# Altium PCB ARDUINO_DUE_2021-11-28.pcbdoc
Units mm, origin at the board's own origin, x right, y up, seen from the top; angles counter-clockwise.
Board outline 118.54 x 77.67 mm, 2 copper layers (Top Layer, Bottom Layer); 1 components, 0 nets, 100 pads, 0 vias.
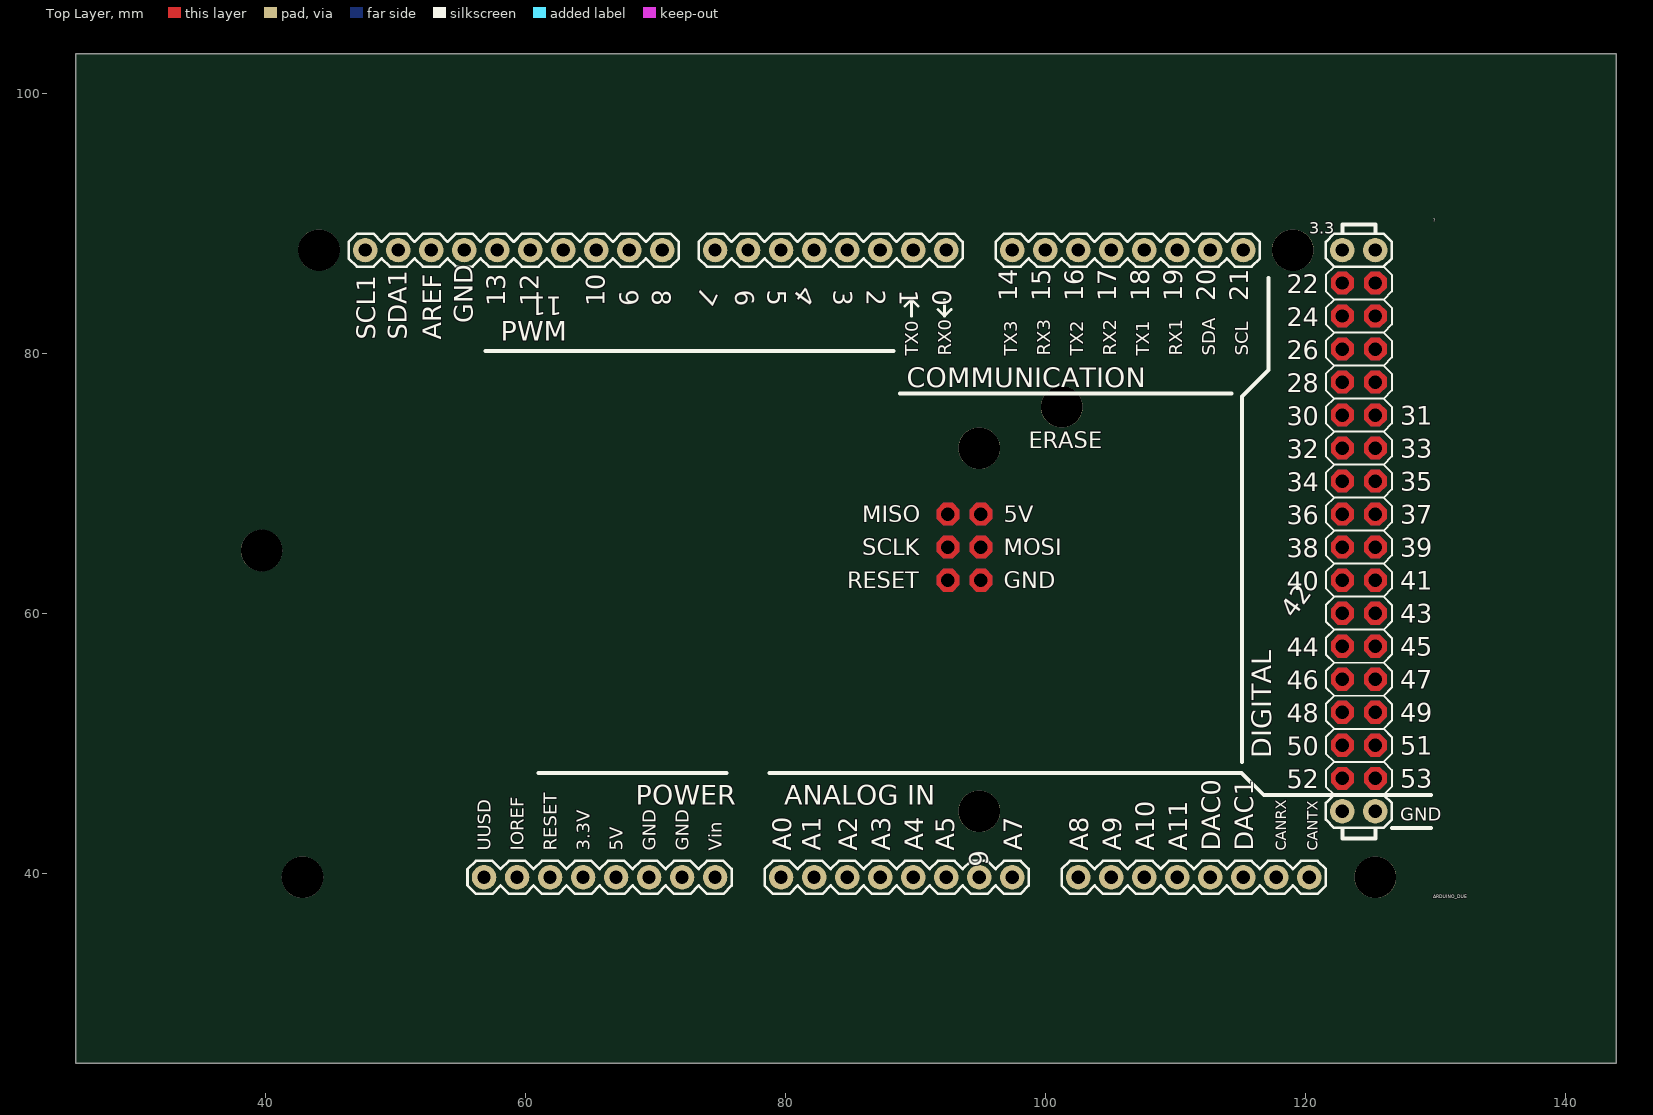
[diagram p0: Top Layer view]
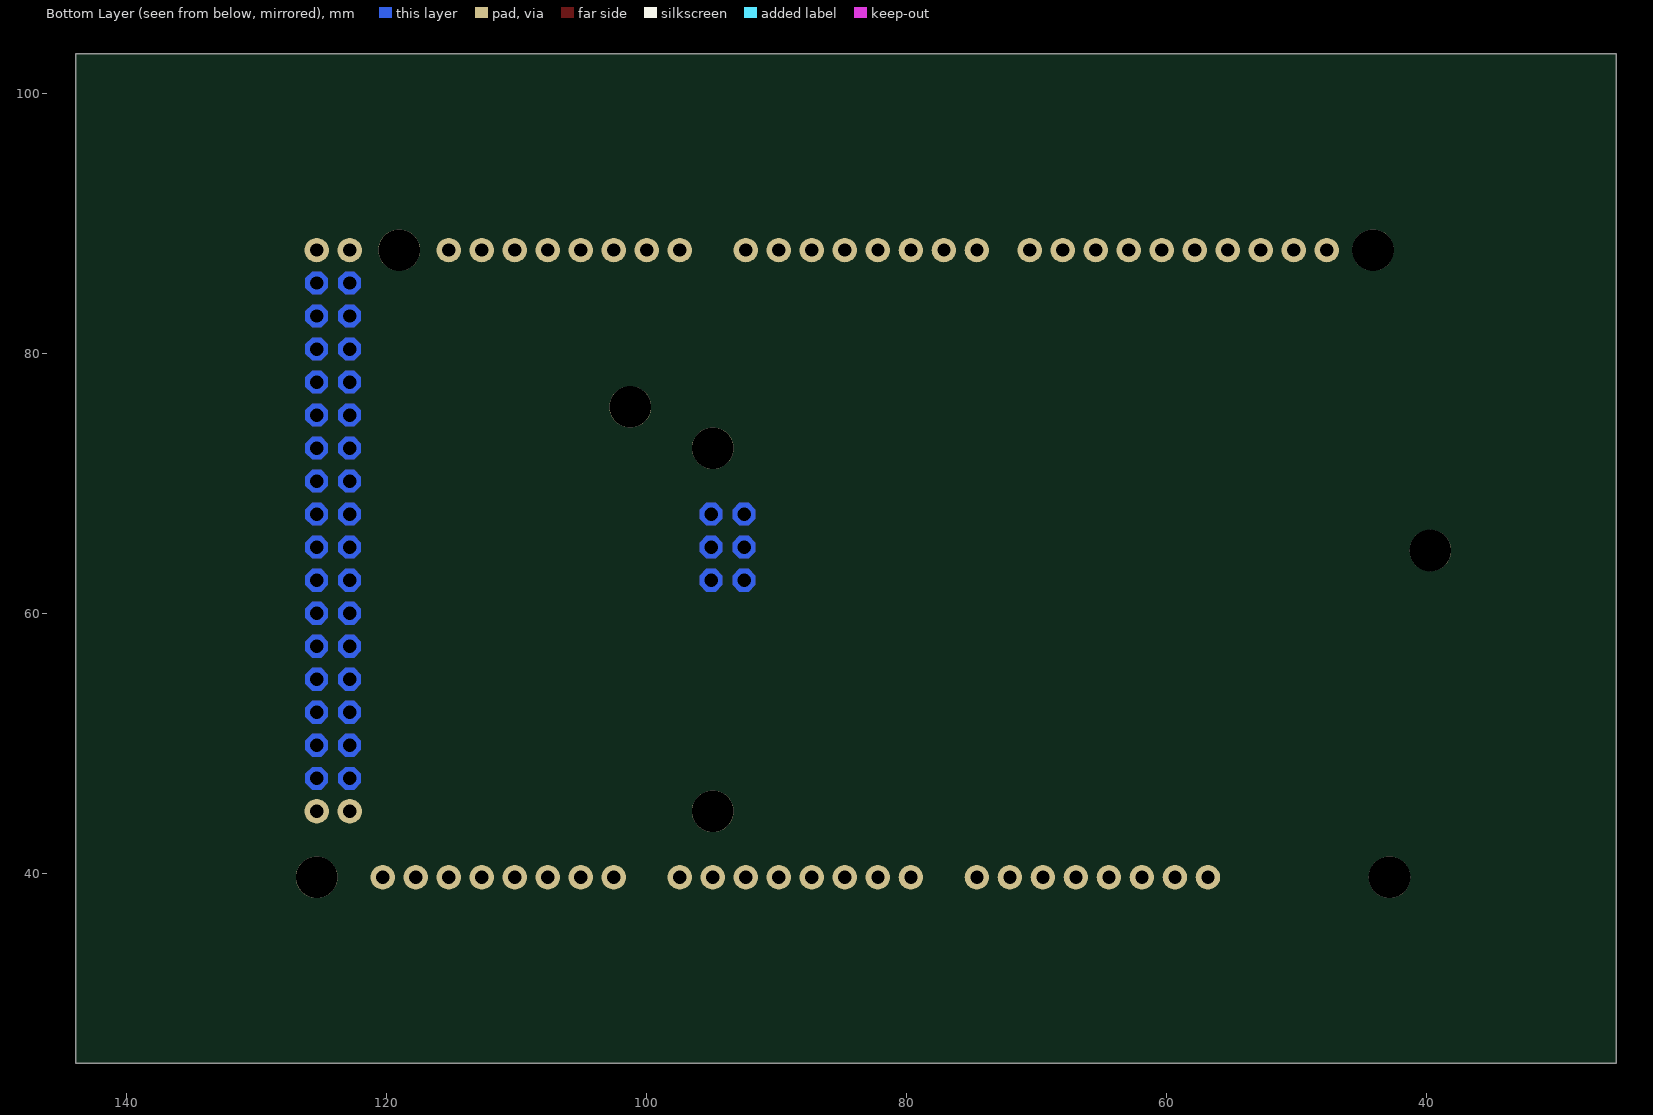
[diagram p1: Bottom Layer view, seen from below]

## Layer stack, top to bottom
Top Layer: signal copper (thickness not stored)
Dielectric: dielectric 0.32, FR-4, Dk 4.8
Bottom Layer: signal copper (thickness not stored)

## Board outline
143.941,25.4 25.4,25.4 25.4,103.073 143.941,103.073

## Components (designator, comment, footprint, x,y, rotation, side; value= is the part's Value field where it differs from the comment)
? "ARDUINO_DUE" ARDUINO_DUE 83.972,64.109 r0 top

## Footprints (in the part's own frame and the unit in brackets; to place one, negate y for a bottom-side part, rotate by r counter-clockwise, add the part's x,y. Pads: shape width x height; smd on the part's side, far side on the other; paste and mask are expansions set on the pad)
ARDUINO_DUE [mil]
  round 74 hole 40: 0(331,938.99) 1(231,938.99) 2(131,938.99) 3(31,938.99) 3.3V(-769,-961) 4(-69,938.99) 5(-169,938.99) 5V@0(-669,-961) 5V@1(1531,938.99) 5V@2(1631,938.99) 6(-269,938.99) 7(-369,938.99) 8(-529,938.99) 9(-629,938.99) 10(-729,938.99) 11(-829,938.99) 12(-929,938.99) 13(-1029,938.99) 14(531,938.99) 15(631,938.99) 16(731,938.99) 17(831,938.99) 18(931,938.99) 19(1031,938.99) 20(1131,938.99) 21(1231,938.99) A0(-169,-961) A1(-69,-961) A2(31,-961) A3(131,-961) A4(231,-961) A5(331,-961) A6(431,-961) A7(531,-961) A8(731,-961) A9(831,-961) A10(931,-961) A11(1031,-961) AREF(-1229,938.99) CANRX(1331,-961) CANTX(1431,-961) DAC0(1131,-961) DAC1(1231,-961) GND@0(-569,-961) GND@1(-469,-961) GND@2(1531,-761) GND@3(1631,-761) GND@4(-1129,938.99) IOREF(-969,-961) RESET(-869,-961) SCL1(-1429,938.99) SDA1(-1329,938.99) UUSD(-1069,-961) VIN(-369,-961)
  round 0 hole 40: 5V@ICSP(436,138.99) 22(1531,838.99) 23(1631,838.99) 24(1531,738.99) 25(1631,738.99) 26(1531,638.99) 27(1631,638.99) 28(1531,538.99) 29(1631,538.99) 30(1531,438.99) 31(1631,438.99) 32(1531,338.99) 33(1631,338.99) 34(1531,238.99) 35(1631,238.99) 36(1531,138.99) 37(1631,138.99) 38(1531,38.99) 39(1631,38.99) 40(1531,-61.01) 41(1631,-61.01) 42(1531,-161.01) 43(1631,-161.01) 44(1531,-261.01) 45(1631,-261.01) 46(1531,-361.01) 47(1631,-361.01) 48(1531,-461.01) 49(1631,-461.01) 50(1531,-561) 51(1631,-561) 52(1531,-661) 53(1631,-661) GND@ICSP(436,-61.01) MISO(336,138.99) MOSI(436,38.99) RESET@ICSP(336,-61.01) SCLK(336,38.99)
  round 125.98 hole 125.98 unplated: ""(-1743,28.99) ""(-1619,-961) ""(-1569,938.99) ""(431,-761) ""(431,338.99) ""(681,463.99) ""(1381,938.99) ""(1631,-961)
  Top Layer region: 1616.84,173.18 1596.81,153.16 1596.81,124.84 1616.84,104.81 1645.15,104.81 1665.18,124.84 1665.18,153.16 1645.15,173.18
  Top Layer region: 1516.84,173.18 1496.81,153.16 1496.81,124.84 1516.84,104.81 1545.15,104.81 1565.18,124.84 1565.18,153.16 1545.15,173.18
  Top Layer region: 1616.84,273.18 1596.81,253.16 1596.81,224.84 1616.84,204.81 1645.15,204.81 1665.18,224.84 1665.18,253.16 1645.15,273.18
  Top Layer region: 1516.84,273.18 1496.81,253.16 1496.81,224.84 1516.84,204.81 1545.15,204.81 1565.18,224.84 1565.18,253.16 1545.15,273.18
  Top Layer region: 1616.84,373.18 1596.81,353.16 1596.81,324.84 1616.84,304.81 1645.15,304.81 1665.18,324.84 1665.18,353.16 1645.15,373.18
  Top Layer region: 1516.84,373.18 1496.81,353.16 1496.81,324.84 1516.84,304.81 1545.15,304.81 1565.18,324.84 1565.18,353.16 1545.15,373.18
  Top Layer region: 1616.84,473.18 1596.81,453.16 1596.81,424.84 1616.84,404.81 1645.15,404.81 1665.18,424.84 1665.18,453.16 1645.15,473.18
  Top Layer region: 1516.84,473.18 1496.81,453.16 1496.81,424.84 1516.84,404.81 1545.15,404.81 1565.18,424.84 1565.18,453.16 1545.15,473.18
  Top Layer region: 1616.84,573.18 1596.81,553.16 1596.81,524.84 1616.84,504.81 1645.15,504.81 1665.18,524.84 1665.18,553.16 1645.15,573.18
  Top Layer region: 1516.84,573.18 1496.81,553.16 1496.81,524.84 1516.84,504.81 1545.15,504.81 1565.18,524.84 1565.18,553.16 1545.15,573.18
  Top Layer region: 1616.84,673.18 1596.81,653.16 1596.81,624.84 1616.84,604.81 1645.15,604.81 1665.18,624.84 1665.18,653.16 1645.15,673.18
  Top Layer region: 1516.84,673.18 1496.81,653.16 1496.81,624.84 1516.84,604.81 1545.15,604.81 1565.18,624.84 1565.18,653.16 1545.15,673.18
  Top Layer region: 1616.84,773.18 1596.81,753.16 1596.81,724.84 1616.84,704.81 1645.15,704.81 1665.18,724.84 1665.18,753.16 1645.15,773.18
  Top Layer region: 1516.84,773.18 1496.81,753.16 1496.81,724.84 1516.84,704.81 1545.15,704.81 1565.18,724.84 1565.18,753.16 1545.15,773.18
  Top Layer region: 1616.84,873.18 1596.81,853.16 1596.81,824.84 1616.84,804.81 1645.15,804.81 1665.18,824.84 1665.18,853.16 1645.15,873.18
  Top Layer region: 1516.84,873.18 1496.81,853.16 1496.81,824.84 1516.84,804.81 1545.15,804.81 1565.18,824.84 1565.18,853.16 1545.15,873.18
  Top Layer region: 1616.84,-626.82 1596.81,-646.84 1596.81,-675.16 1616.84,-695.18 1645.15,-695.18 1665.18,-675.16 1665.18,-646.84 1645.15,-626.82
  Top Layer region: 1516.84,-626.82 1496.81,-646.84 1496.81,-675.16 1516.84,-695.18 1545.15,-695.18 1565.18,-675.16 1565.18,-646.84 1545.15,-626.82
  Top Layer region: 1616.84,-526.82 1596.81,-546.84 1596.81,-575.16 1616.84,-595.18 1645.15,-595.18 1665.18,-575.16 1665.18,-546.84 1645.15,-526.82
  Top Layer region: 1516.84,-526.82 1496.81,-546.84 1496.81,-575.16 1516.84,-595.18 1545.15,-595.18 1565.18,-575.16 1565.18,-546.84 1545.15,-526.82
  Top Layer region: 1616.84,-426.82 1596.81,-446.84 1596.81,-475.16 1616.84,-495.18 1645.15,-495.18 1665.18,-475.16 1665.18,-446.84 1645.15,-426.82
  Top Layer region: 1516.84,-426.82 1496.81,-446.84 1496.81,-475.16 1516.84,-495.18 1545.15,-495.18 1565.18,-475.16 1565.18,-446.84 1545.15,-426.82
  Top Layer region: 1616.84,-326.82 1596.81,-346.84 1596.81,-375.16 1616.84,-395.18 1645.15,-395.18 1665.18,-375.16 1665.18,-346.84 1645.15,-326.82
  Top Layer region: 1516.84,-326.82 1496.81,-346.84 1496.81,-375.16 1516.84,-395.18 1545.15,-395.18 1565.18,-375.16 1565.18,-346.84 1545.15,-326.82
  Top Layer region: 1616.84,-226.82 1596.81,-246.84 1596.81,-275.16 1616.84,-295.18 1645.15,-295.18 1665.18,-275.16 1665.18,-246.84 1645.15,-226.82
  Top Layer region: 1516.84,-226.82 1496.81,-246.84 1496.81,-275.16 1516.84,-295.18 1545.15,-295.18 1565.18,-275.16 1565.18,-246.84 1545.15,-226.82
  Top Layer region: 1616.84,-126.82 1596.81,-146.84 1596.81,-175.16 1616.84,-195.19 1645.15,-195.19 1665.18,-175.16 1665.18,-146.84 1645.15,-126.82
  Top Layer region: 1516.84,-126.82 1496.81,-146.84 1496.81,-175.16 1516.84,-195.19 1545.15,-195.19 1565.18,-175.16 1565.18,-146.84 1545.15,-126.82
  Top Layer region: 1616.84,-26.82 1596.81,-46.84 1596.81,-75.16 1616.84,-95.19 1645.15,-95.19 1665.18,-75.16 1665.18,-46.84 1645.15,-26.82
  Top Layer region: 1516.84,-26.82 1496.81,-46.84 1496.81,-75.16 1516.84,-95.19 1545.15,-95.19 1565.18,-75.16 1565.18,-46.84 1545.15,-26.82
  Top Layer region: 1616.84,73.18 1596.81,53.16 1596.81,24.84 1616.84,4.81 1645.15,4.81 1665.18,24.84 1665.18,53.16 1645.15,73.18
  Top Layer region: 1516.84,73.18 1496.81,53.16 1496.81,24.84 1516.84,4.81 1545.15,4.81 1565.18,24.84 1565.18,53.16 1545.15,73.18
  Top Layer region: 321.84,173.18 301.81,153.16 301.81,124.84 321.84,104.81 350.16,104.81 370.18,124.84 370.18,153.16 350.16,173.18
  Top Layer region: 421.84,173.18 401.81,153.16 401.81,124.84 421.84,104.81 450.16,104.81 470.18,124.84 470.18,153.16 450.16,173.18
  Top Layer region: 321.84,73.18 301.81,53.16 301.81,24.84 321.84,4.81 350.16,4.81 370.18,24.84 370.18,53.16 350.16,73.18
  Top Layer region: 421.84,73.18 401.81,53.16 401.81,24.84 421.84,4.81 450.16,4.81 470.18,24.84 470.18,53.16 450.16,73.18
  Top Layer region: 421.84,-26.82 401.81,-46.84 401.81,-75.16 421.84,-95.19 450.16,-95.19 470.18,-75.16 470.18,-46.84 450.16,-26.82
  Top Layer region: 321.84,-26.82 301.81,-46.84 301.81,-75.16 321.84,-95.19 350.16,-95.19 370.18,-75.16 370.18,-46.84 350.16,-26.82
  Bottom Layer region: 1616.84,173.18 1596.81,153.16 1596.81,124.84 1616.84,104.81 1645.15,104.81 1665.18,124.84 1665.18,153.16 1645.15,173.18
  Bottom Layer region: 1516.84,173.18 1496.81,153.16 1496.81,124.84 1516.84,104.81 1545.15,104.81 1565.18,124.84 1565.18,153.16 1545.15,173.18
  Bottom Layer region: 1616.84,273.18 1596.81,253.16 1596.81,224.84 1616.84,204.81 1645.15,204.81 1665.18,224.84 1665.18,253.16 1645.15,273.18
  Bottom Layer region: 1516.84,273.18 1496.81,253.16 1496.81,224.84 1516.84,204.81 1545.15,204.81 1565.18,224.84 1565.18,253.16 1545.15,273.18
  Bottom Layer region: 1616.84,373.18 1596.81,353.16 1596.81,324.84 1616.84,304.81 1645.15,304.81 1665.18,324.84 1665.18,353.16 1645.15,373.18
  Bottom Layer region: 1516.84,373.18 1496.81,353.16 1496.81,324.84 1516.84,304.81 1545.15,304.81 1565.18,324.84 1565.18,353.16 1545.15,373.18
  Bottom Layer region: 1616.84,473.18 1596.81,453.16 1596.81,424.84 1616.84,404.81 1645.15,404.81 1665.18,424.84 1665.18,453.16 1645.15,473.18
  Bottom Layer region: 1516.84,473.18 1496.81,453.16 1496.81,424.84 1516.84,404.81 1545.15,404.81 1565.18,424.84 1565.18,453.16 1545.15,473.18
  Bottom Layer region: 1616.84,573.18 1596.81,553.16 1596.81,524.84 1616.84,504.81 1645.15,504.81 1665.18,524.84 1665.18,553.16 1645.15,573.18
  Bottom Layer region: 1516.84,573.18 1496.81,553.16 1496.81,524.84 1516.84,504.81 1545.15,504.81 1565.18,524.84 1565.18,553.16 1545.15,573.18
  Bottom Layer region: 1616.84,673.18 1596.81,653.16 1596.81,624.84 1616.84,604.81 1645.15,604.81 1665.18,624.84 1665.18,653.16 1645.15,673.18
  Bottom Layer region: 1516.84,673.18 1496.81,653.16 1496.81,624.84 1516.84,604.81 1545.15,604.81 1565.18,624.84 1565.18,653.16 1545.15,673.18
  Bottom Layer region: 1616.84,773.18 1596.81,753.16 1596.81,724.84 1616.84,704.81 1645.15,704.81 1665.18,724.84 1665.18,753.16 1645.15,773.18
  Bottom Layer region: 1516.84,773.18 1496.81,753.16 1496.81,724.84 1516.84,704.81 1545.15,704.81 1565.18,724.84 1565.18,753.16 1545.15,773.18
  Bottom Layer region: 1616.84,873.18 1596.81,853.16 1596.81,824.84 1616.84,804.81 1645.15,804.81 1665.18,824.84 1665.18,853.16 1645.15,873.18
  Bottom Layer region: 1516.84,873.18 1496.81,853.16 1496.81,824.84 1516.84,804.81 1545.15,804.81 1565.18,824.84 1565.18,853.16 1545.15,873.18
  Bottom Layer region: 1616.84,-626.82 1596.81,-646.84 1596.81,-675.16 1616.84,-695.18 1645.15,-695.18 1665.18,-675.16 1665.18,-646.84 1645.15,-626.82
  Bottom Layer region: 1516.84,-626.82 1496.81,-646.84 1496.81,-675.16 1516.84,-695.18 1545.15,-695.18 1565.18,-675.16 1565.18,-646.84 1545.15,-626.82
  Bottom Layer region: 1616.84,-526.82 1596.81,-546.84 1596.81,-575.16 1616.84,-595.18 1645.15,-595.18 1665.18,-575.16 1665.18,-546.84 1645.15,-526.82
  Bottom Layer region: 1516.84,-526.82 1496.81,-546.84 1496.81,-575.16 1516.84,-595.18 1545.15,-595.18 1565.18,-575.16 1565.18,-546.84 1545.15,-526.82
  Bottom Layer region: 1616.84,-426.82 1596.81,-446.84 1596.81,-475.16 1616.84,-495.18 1645.15,-495.18 1665.18,-475.16 1665.18,-446.84 1645.15,-426.82
  Bottom Layer region: 1516.84,-426.82 1496.81,-446.84 1496.81,-475.16 1516.84,-495.18 1545.15,-495.18 1565.18,-475.16 1565.18,-446.84 1545.15,-426.82
  Bottom Layer region: 1616.84,-326.82 1596.81,-346.84 1596.81,-375.16 1616.84,-395.18 1645.15,-395.18 1665.18,-375.16 1665.18,-346.84 1645.15,-326.82
  Bottom Layer region: 1516.84,-326.82 1496.81,-346.84 1496.81,-375.16 1516.84,-395.18 1545.15,-395.18 1565.18,-375.16 1565.18,-346.84 1545.15,-326.82
  Bottom Layer region: 1616.84,-226.82 1596.81,-246.84 1596.81,-275.16 1616.84,-295.18 1645.15,-295.18 1665.18,-275.16 1665.18,-246.84 1645.15,-226.82
  Bottom Layer region: 1516.84,-226.82 1496.81,-246.84 1496.81,-275.16 1516.84,-295.18 1545.15,-295.18 1565.18,-275.16 1565.18,-246.84 1545.15,-226.82
  Bottom Layer region: 1616.84,-126.82 1596.81,-146.84 1596.81,-175.16 1616.84,-195.19 1645.15,-195.19 1665.18,-175.16 1665.18,-146.84 1645.15,-126.82
  Bottom Layer region: 1516.84,-126.82 1496.81,-146.84 1496.81,-175.16 1516.84,-195.19 1545.15,-195.19 1565.18,-175.16 1565.18,-146.84 1545.15,-126.82
  Bottom Layer region: 1616.84,-26.82 1596.81,-46.84 1596.81,-75.16 1616.84,-95.19 1645.15,-95.19 1665.18,-75.16 1665.18,-46.84 1645.15,-26.82
  Bottom Layer region: 1516.84,-26.82 1496.81,-46.84 1496.81,-75.16 1516.84,-95.19 1545.15,-95.19 1565.18,-75.16 1565.18,-46.84 1545.15,-26.82
  Bottom Layer region: 1616.84,73.18 1596.81,53.16 1596.81,24.84 1616.84,4.81 1645.15,4.81 1665.18,24.84 1665.18,53.16 1645.15,73.18
  Bottom Layer region: 1516.84,73.18 1496.81,53.16 1496.81,24.84 1516.84,4.81 1545.15,4.81 1565.18,24.84 1565.18,53.16 1545.15,73.18
  Bottom Layer region: 321.84,173.18 301.81,153.16 301.81,124.84 321.84,104.81 350.16,104.81 370.18,124.84 370.18,153.16 350.16,173.18
  Bottom Layer region: 421.84,173.18 401.81,153.16 401.81,124.84 421.84,104.81 450.16,104.81 470.18,124.84 470.18,153.16 450.16,173.18
  Bottom Layer region: 321.84,73.18 301.81,53.16 301.81,24.84 321.84,4.81 350.16,4.81 370.18,24.84 370.18,53.16 350.16,73.18
  Bottom Layer region: 421.84,73.18 401.81,53.16 401.81,24.84 421.84,4.81 450.16,4.81 470.18,24.84 470.18,53.16 450.16,73.18
  Bottom Layer region: 421.84,-26.82 401.81,-46.84 401.81,-75.16 421.84,-95.19 450.16,-95.19 470.18,-75.16 470.18,-46.84 450.16,-26.82
  Bottom Layer region: 321.84,-26.82 301.81,-46.84 301.81,-75.16 321.84,-95.19 350.16,-95.19 370.18,-75.16 370.18,-46.84 350.16,-26.82
  silkscreen extent -1479,-1011 1800,1017

## Nets (pads, with @x,y where several pads share a name; then routed paths per layer and width w, separated by ;. In a path a pad name is that pad's centre, name@x,y a point inside that pad or via, vN(x,y) a via of type N, cw(c..) or ccw(c..) an arc to the next point about the centre after c; other vN are vias at no path point)
pads on no net: ?. ?.0 ?.1 ?.2 ?.3 ?.3.3V ?.4 ?.5 ?.5V@0 ?.5V@1 ?.5V@2 ?.5V@ICSP ?.6 ?.7 ?.8 ?.9 ?.10 ?.11 ?.12 ?.13 ?.14 ?.15 ?.16 ?.17 ?.18 ?.19 ?.20 ?.21 ?.22 ?.23 ?.24 ?.25 ?.26 ?.27 ?.28 ?.29 ?.30 ?.31 ?.32 ?.33 ?.34 ?.35 ?.36 ?.37 ?.38 ?.39 ?.40 ?.41 ?.42 ?.43 ?.44 ?.45 ?.46 ?.47 ?.48 ?.49 ?.50 ?.51 ?.52 ?.53 ?.A0 ?.A1 ?.A2 ?.A3 ?.A4 ?.A5 ?.A6 ?.A7 ?.A8 ?.A9 ?.A10 ?.A11 ?.AREF ?.CANRX ?.CANTX ?.DAC0 ?.DAC1 ?.GND@0 ?.GND@1 ?.GND@2 ?.GND@3 ?.GND@4 ?.GND@ICSP ?.IOREF ?.MISO ?.MOSI ?.RESET ?.RESET@ICSP ?.SCL1 ?.SCLK ?.SDA1 ?.UUSD ?.VIN

## Silkscreen, mask and mechanical layers (free items; w line width, h text height)
Document:
  lines w0.003: 84.645,64.211 84.696,64.262

## Text inside footprints (layer, text, board x,y; h text height)
?: Top Overlay "0" at 91.338,84.912 h1.42 r270; Top Overlay "1" at 88.798,84.912 h1.42 r270; Top Overlay "2" at 86.258,84.912 h1.42 r270; Top Overlay "3" at 83.718,84.912 h1.42 r270; Top Overlay "4" at 81.314,85.33 h1.42 r234; Top Overlay "5" at 78.638,84.912 h1.42 r270; Top Overlay "6" at 76.101,84.85 h1.42 r275; Top Overlay "7" at 73.625,85.213 h1.42 r245; Top Overlay "8" at 69.748,84.912 h1.42 r270; Top Overlay "9" at 67.211,84.85 h1.42 r275; Top Overlay "10" at 66.091,83.642 h1.42 r90; Top Overlay "11" at 62.839,84.353 h1.42 r180; Top Overlay "12" at 61.011,83.642 h1.42 r90; Top Overlay "13" at 58.471,83.642 h1.42 r90; Top Overlay "14" at 97.841,84.023 h1.42 r90; Top Overlay "15" at 100.381,84.023 h1.42 r90; Top Overlay "16" at 102.921,84.023 h1.42 r90; Top Overlay "17" at 105.461,84.023 h1.42 r90; Top Overlay "18" at 108.001,84.023 h1.42 r90; Top Overlay "19" at 110.541,84.023 h1.42 r90; Top Overlay "20" at 113.081,84.023 h1.42 r90; Top Overlay "21" at 115.621,84.023 h1.42 r90; Top Overlay "22" at 118.567,84.658 h1.42; Top Overlay "24" at 118.567,82.118 h1.42; Top Overlay "26" at 118.567,79.578 h1.42; Top Overlay "28" at 118.567,77.038 h1.42; Top Overlay "30" at 118.567,74.498 h1.42; Top Overlay "32" at 118.567,71.958 h1.42; Top Overlay "34" at 118.567,69.418 h1.42; Top Overlay "36" at 118.567,66.878 h1.42; Top Overlay "38" at 118.567,64.338 h1.42; Top Overlay "40" at 118.567,61.798 h1.42; Top Overlay "42" at 119.142,59.551 h1.42 r54; Top Overlay "44" at 118.567,56.718 h1.42; Top Overlay "46" at 118.567,54.178 h1.42; Top Overlay "50" at 118.567,49.098 h1.42; Top Overlay "48" at 118.567,51.638 h1.42; Top Overlay "52" at 118.567,46.558 h1.42; Top Overlay "31" at 127.305,74.523 h1.42; Top Overlay "33" at 127.305,71.983 h1.42; Top Overlay "35" at 127.305,69.443 h1.42; Top Overlay "37" at 127.305,66.903 h1.42; Top Overlay "39" at 127.305,64.363 h1.42; Top Overlay "41" at 127.305,61.823 h1.42; Top Overlay "43" at 127.305,59.283 h1.42; Top Overlay "45" at 127.305,56.743 h1.42; Top Overlay "47" at 127.305,54.203 h1.42; Top Overlay "49" at 127.305,51.663 h1.42; Top Overlay "51" at 127.305,49.123 h1.42; Top Overlay "53" at 127.305,46.583 h1.42; Top Overlay "A0" at 80.442,41.757 h1.42 r90; Top Overlay "A1" at 82.728,41.757 h1.42 r90; Top Overlay "A2" at 85.522,41.757 h1.42 r90; Top Overlay "A3" at 88.062,41.757 h1.42 r90; Top Overlay "A4" at 90.602,41.757 h1.42 r90; Top Overlay "A5" at 93.015,41.757 h1.42 r90; Top Overlay "6" at 94.135,41.695 h1.42 r275; Top Overlay "A7" at 98.222,41.757 h1.42 r90; Top Overlay "A8" at 103.302,41.757 h1.42 r90; Top Overlay "A9" at 105.842,41.757 h1.42 r90; Top Overlay "A10" at 108.382,41.757 h1.42 r90; Top Overlay "A11" at 110.922,41.757 h1.42 r90; Top Overlay "DAC0" at 113.462,41.757 h1.42 r90; Top Overlay "DAC1" at 116.002,41.757 h1.42 r90; Top Overlay "CANRX" at 118.542,41.757 h0.81 r90; Top Overlay "CANTX" at 120.955,41.757 h0.81 r90; Top Overlay "ANALOG IN" at 79.934,45.288 h1.52; Top Overlay "COMMUNICATION" at 89.332,77.419 h1.52; Top Overlay "DIGITAL" at 117.399,48.844 h1.52 r90; Top Overlay "GND" at 127.305,44.043 h1.02; Top Overlay "TX0" at 90.221,79.832 h1.02 r90; Top Overlay "RX0" at 92.761,79.832 h1.02 r90; Top Overlay "PWM" at 58.09,80.975 h1.52; Top Overlay "TX3" at 97.841,79.832 h1.02 r90; Top Overlay "RX3" at 100.381,79.832 h1.02 r90; Top Overlay "TX2" at 102.921,79.832 h1.02 r90; Top Overlay "RX2" at 105.461,79.832 h1.02 r90; Top Overlay "TX1" at 108.001,79.832 h1.02 r90; Top Overlay "RX1" at 110.541,79.832 h1.02 r90; Top Overlay "SDA" at 113.081,79.832 h1.02 r90; Top Overlay "SCL" at 115.621,79.832 h1.02 r90; Top Overlay "POWER" at 68.504,45.288 h1.52; Top Overlay "RESET" at 62.408,41.757 h1.02 r90; Top Overlay "3.3V" at 64.948,41.757 h1.02 r90; Top Overlay "5V" at 67.488,41.757 h1.02 r90; Top Overlay "GND" at 70.028,41.757 h1.02 r90; Top Overlay "GND" at 72.568,41.757 h1.02 r90; Top Overlay "Vin" at 75.108,41.757 h1.02 r90; Top Overlay "GND" at 55.956,82.341 h1.42 r90; Top Overlay "AREF" at 53.543,81.061 h1.42 r90; Top Overlay "3.3" at 120.32,89.23 h0.89; Top Overlay "SDA1" at 50.876,81.061 h1.42 r90; Top Overlay "SCL1" at 48.463,81.061 h1.42 r90; Top Overlay "IOREF" at 59.868,41.757 h1.02 r90; Top Overlay "UUSD" at 57.328,41.757 h1.02 r90; Top Overlay "ERASE" at 98.73,72.72 h1.27; Top Overlay "5V" at 96.825,67.005 h1.27; Top Overlay "MOSI" at 96.825,64.465 h1.27; Top Overlay "GND" at 96.825,61.925 h1.27; Top Overlay "RESET" at 84.76,61.925 h1.27; Top Overlay "SCLK" at 85.903,64.465 h1.27; Top Overlay "MISO" at 85.903,67.005 h1.27